# Altium PCB SensorBoard_PCB.PcbDoc (part 1 of 2)
Units mm, origin at the board's own origin, x right, y up, seen from the top; angles counter-clockwise.
Board outline 30.45 x 31.34 mm, 4 copper layers (Top Layer, GND, 3.3V, Bottom Layer), stack 1.561 mm thick; 41 components, 34 nets, 218 pads, 43 vias.
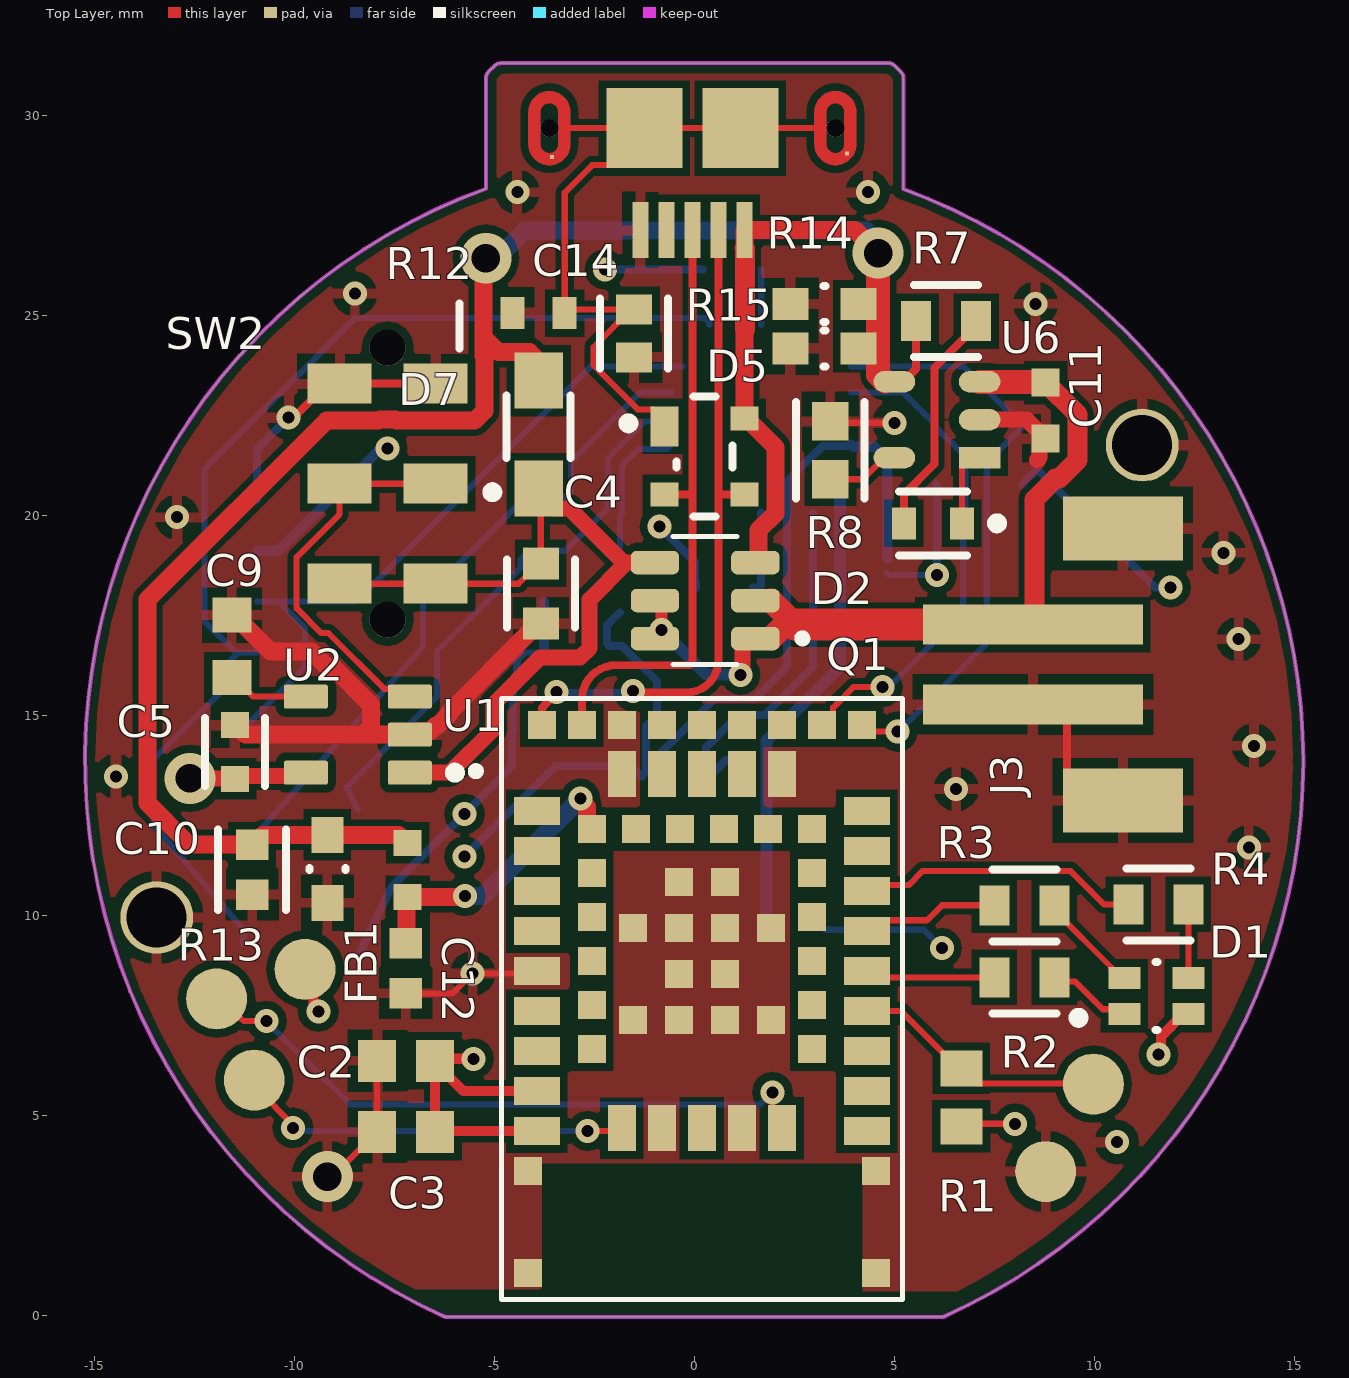
[diagram p0: Top Layer view]
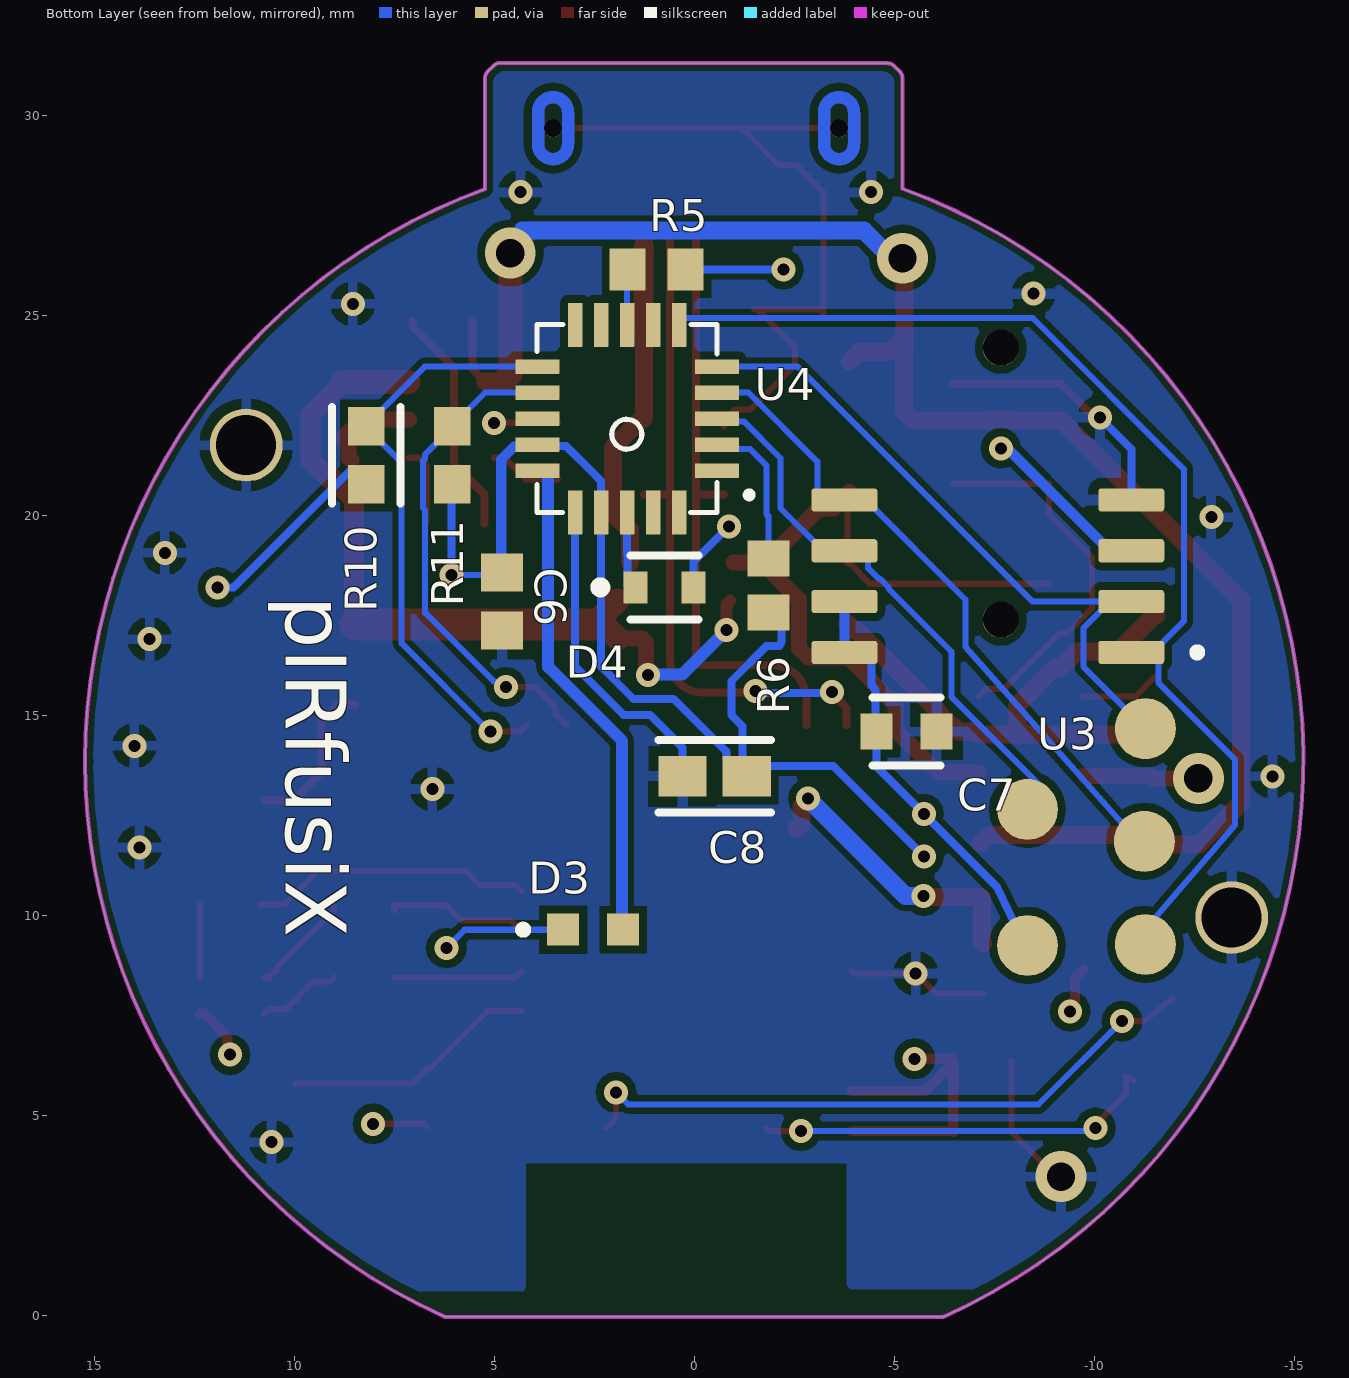
[diagram p1: Bottom Layer view, seen from below]
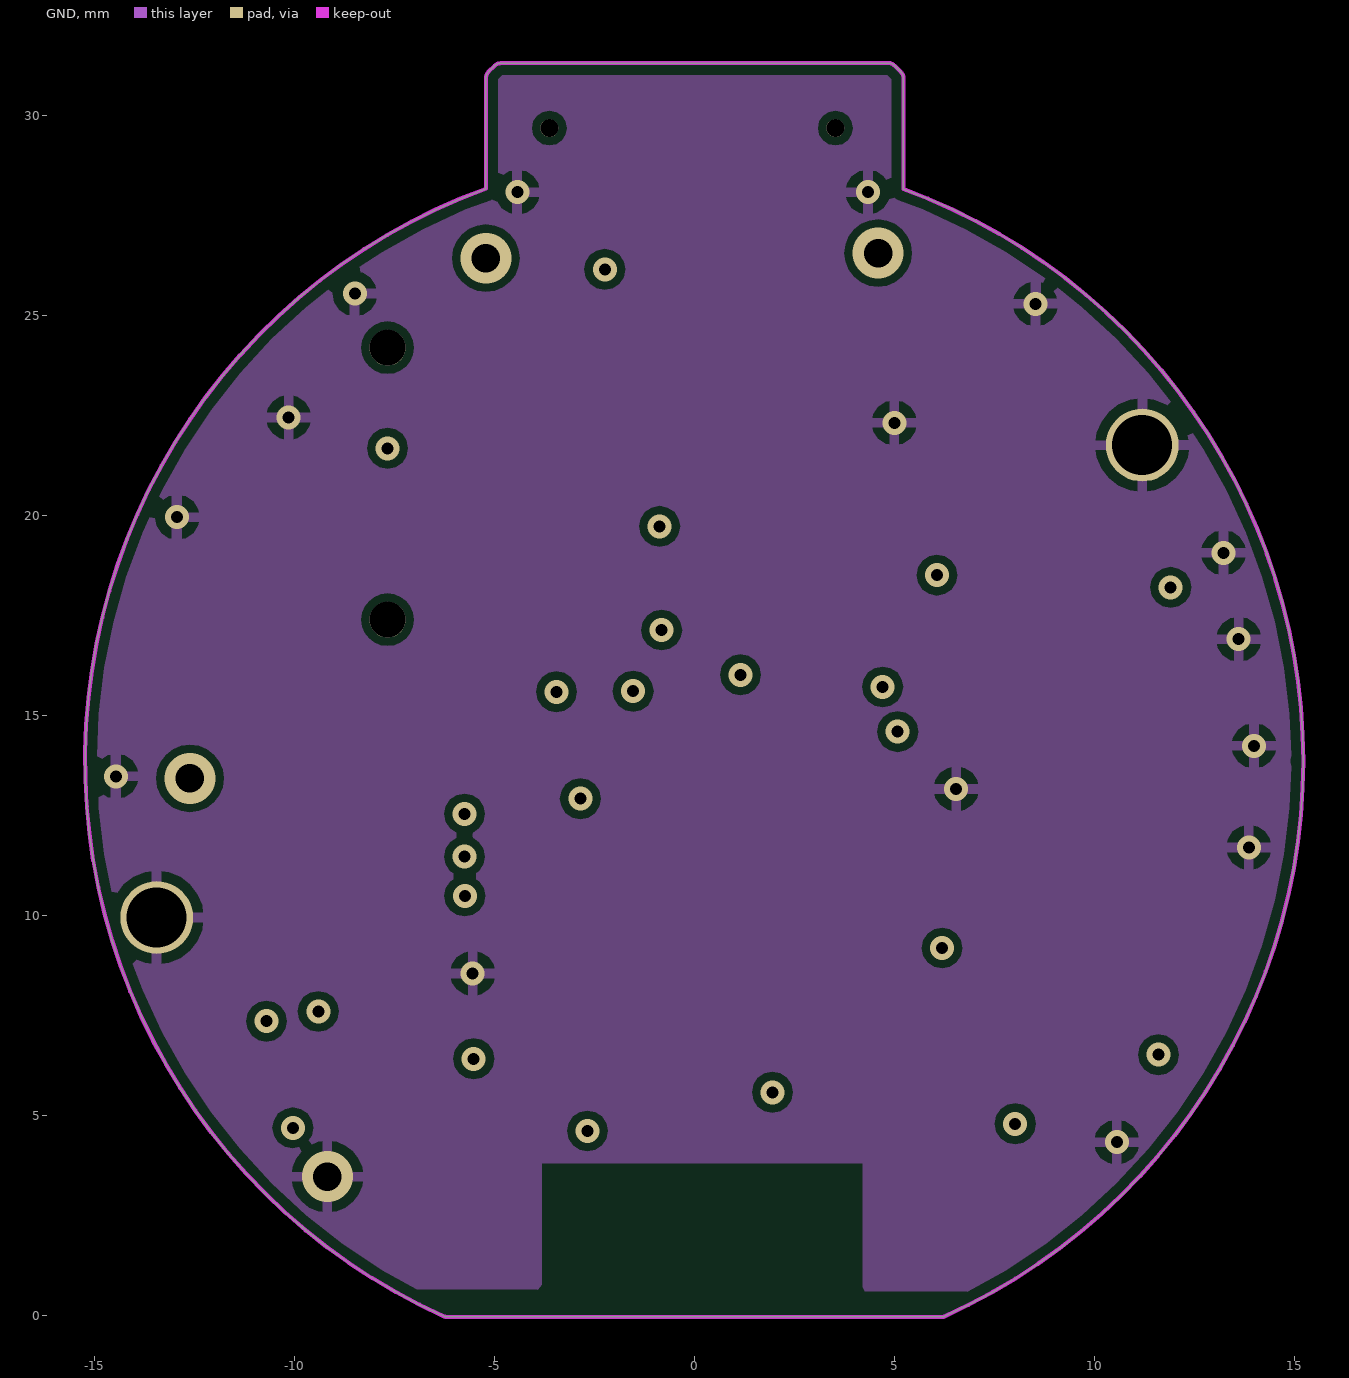
[diagram p2: GND]
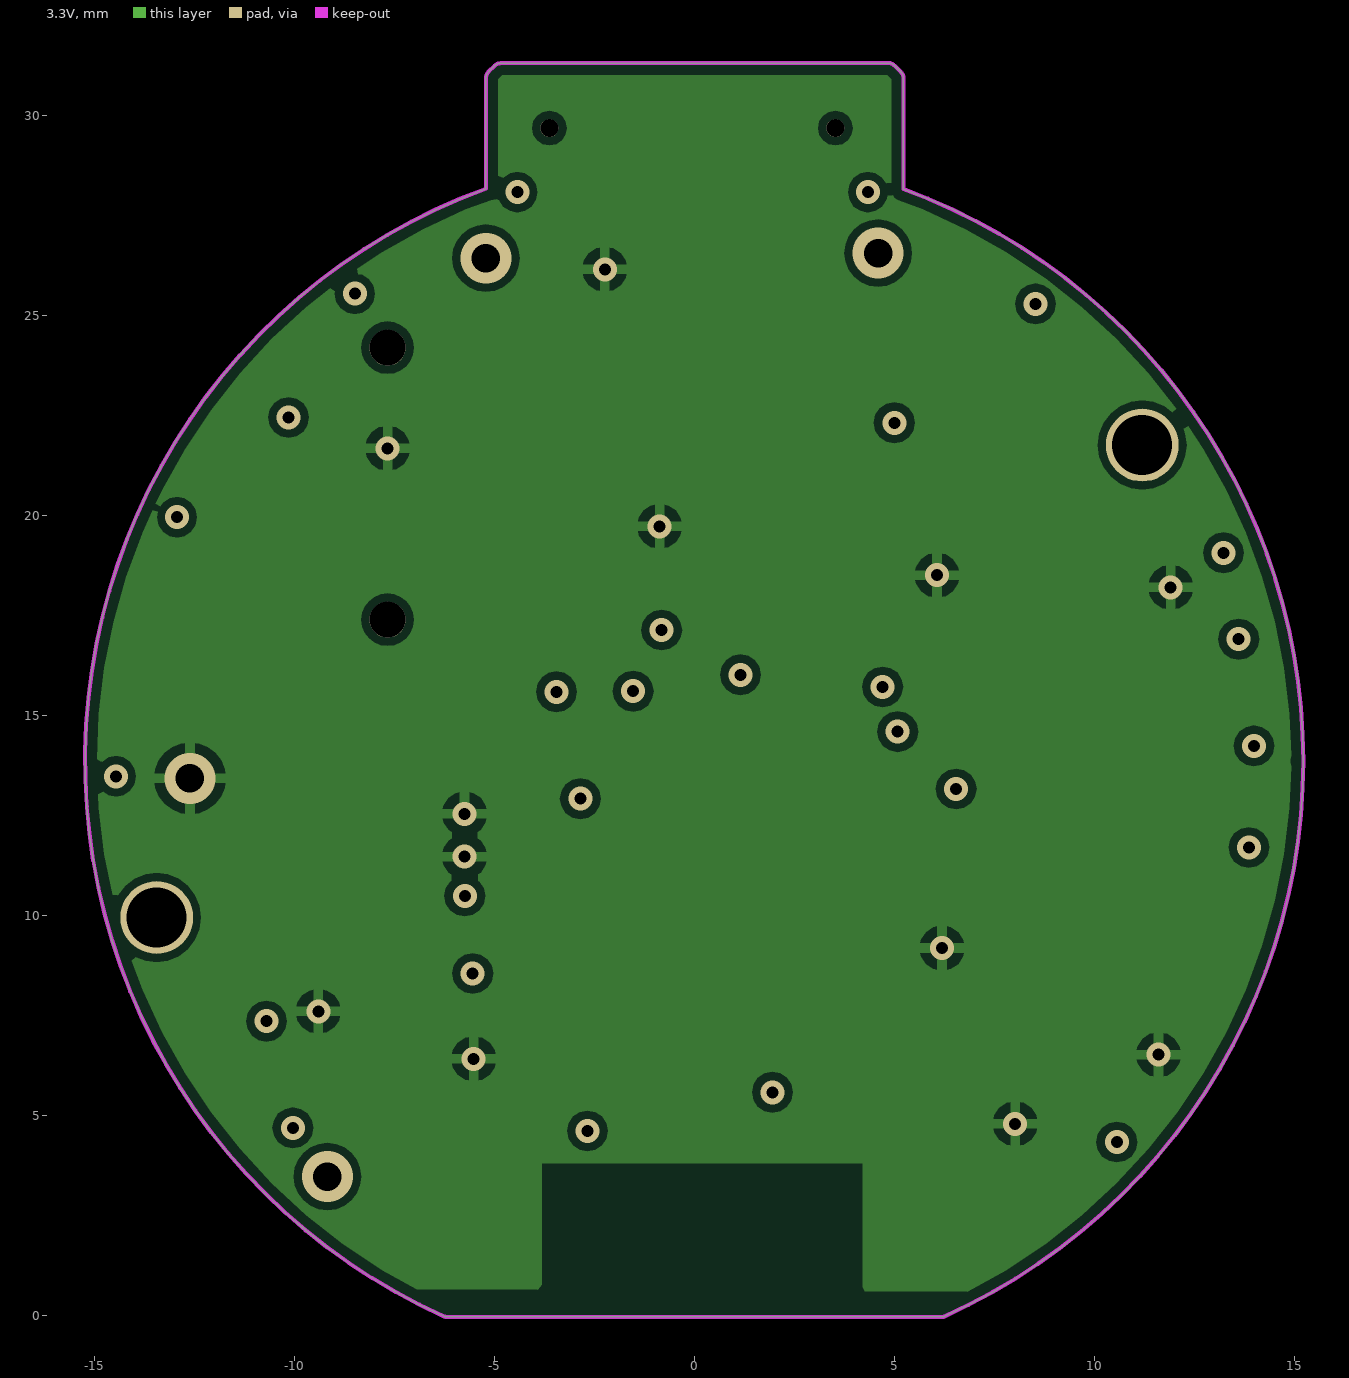
[diagram p3: 3.3V]
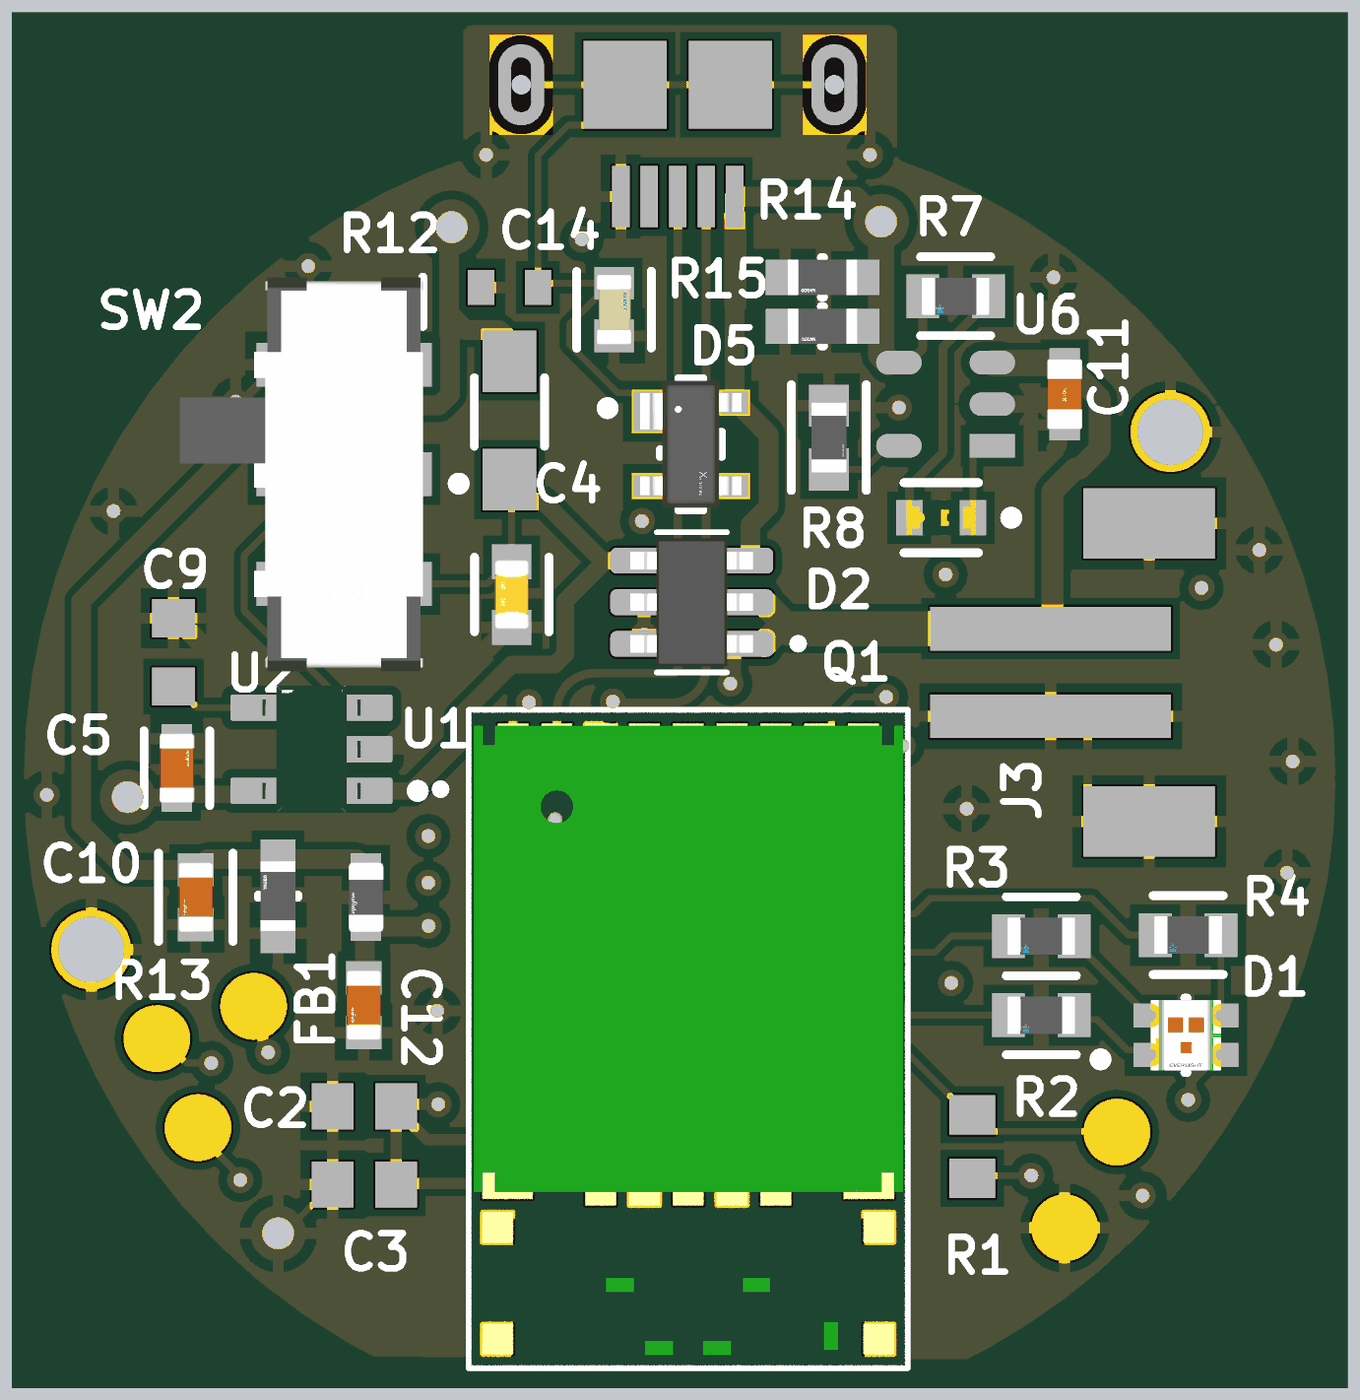
[diagram p5: 3D render of the assembled board from above, using the file's embedded part models]
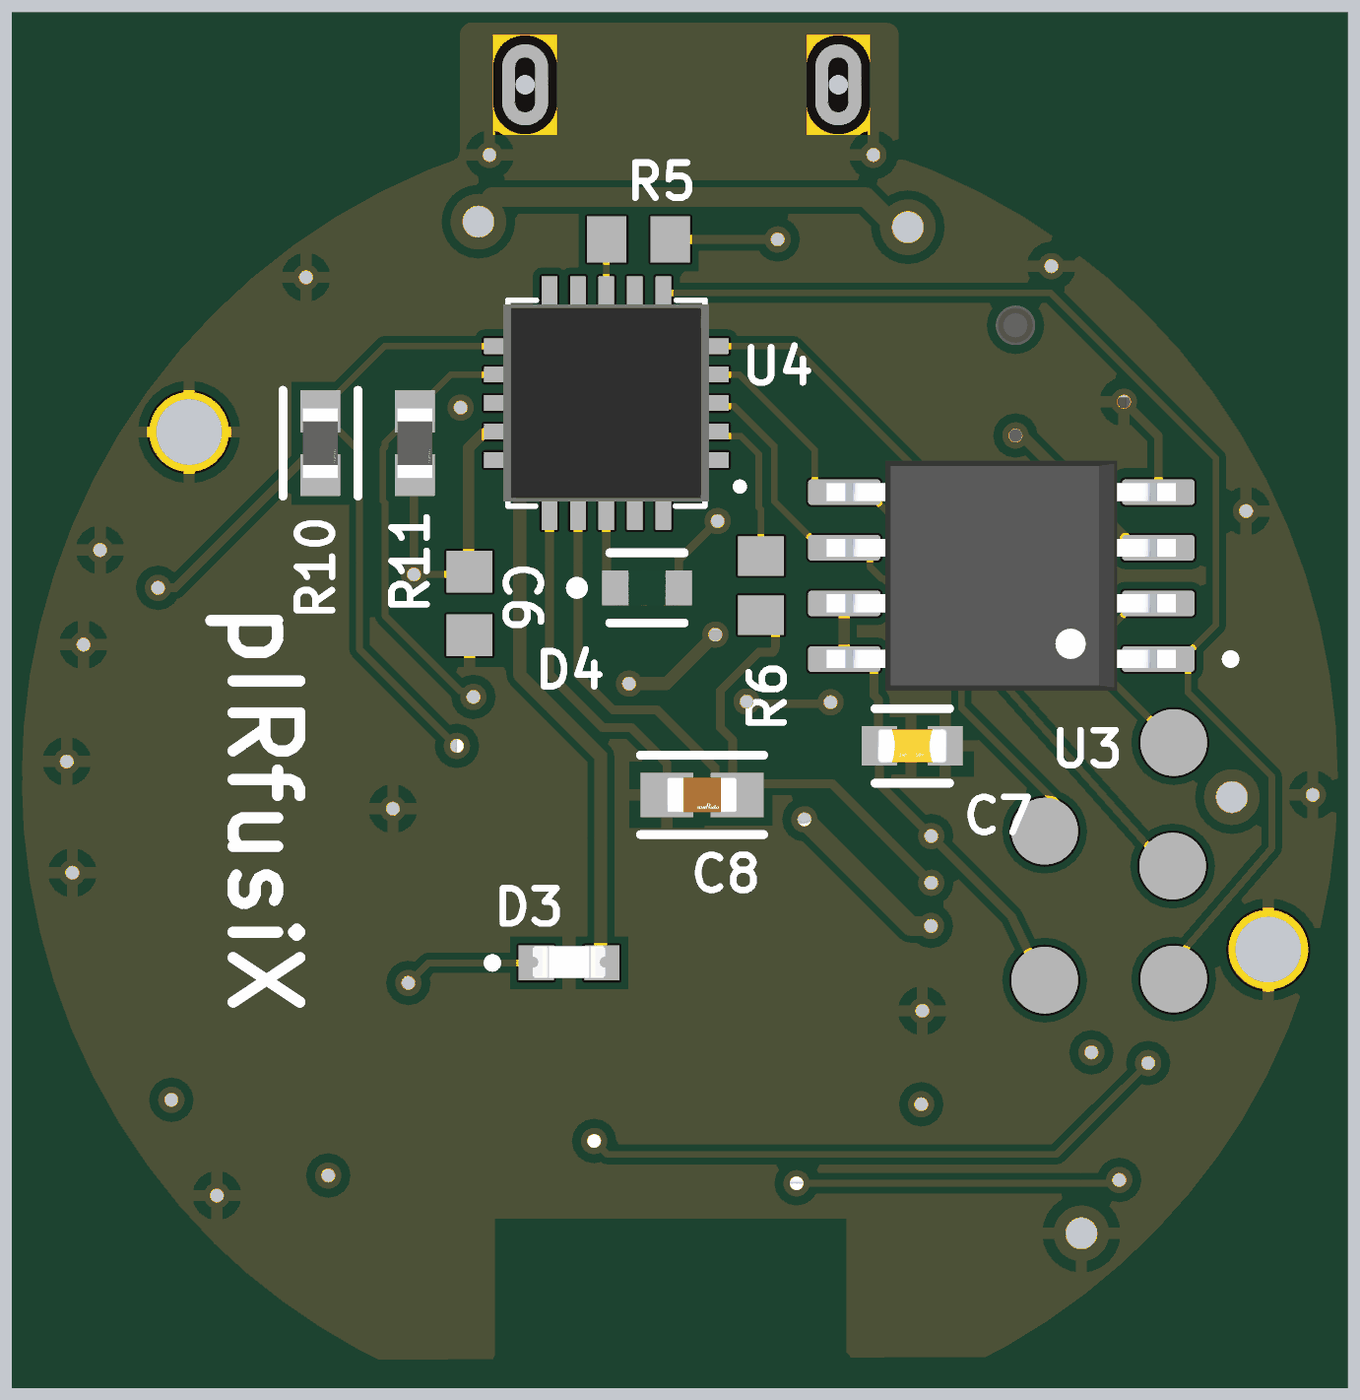
[diagram p6: 3D render of the assembled board from below, using the file's embedded part models]

## Layer stack, top to bottom
Top Solder: solder mask 0.0102, Solder Resist, Dk 3.5
Top Layer: signal copper 0.0356
Dielectric 2: prepreg 0.11, PP-006, Dk 4.1
GND: signal copper 0.035
Dielectric 1: dielectric 1.2, FR-4, Dk 4.8
3.3V: signal copper 0.035
Dielectric 3: prepreg 0.11, PP-006, Dk 4.1
Bottom Layer: signal copper 0.0356
Bottom Solder: solder mask 0.0102, Solder Resist, Dk 3.5

## Board outline
-6.255,-0.028 ccw(c-6.214,0.064) -6.214,-0.037 ccw(c-6.214,0.064) -6.213,-0.037 ccw(c-6.214,0.064) -6.213,-0.037 6.214,-0.037 ccw(c6.214,0.013) 6.214,-0.037 ccw(c6.214,0.063) 6.255,-0.028 ccw(c0,13.856) 15.228,13.856 ccw(c15.127,13.856) 15.228,13.856 ccw(c15.127,13.856) 15.228,13.856 ccw(c0,13.856) 5.232,28.157 5.232,30.928 ccw(c5.181,30.928) 5.232,30.929 cw(c5.005,30.929) 5.232,30.929 cw(c5.005,30.929) 5.232,30.928 ccw(c5.181,30.929) 5.232,30.928 ccw(c5.181,30.929) 5.232,30.929 5.232,30.928 ccw(c5.131,30.928) 5.232,30.93 ccw(c5.131,30.928) 5.232,30.93 ccw(c5.005,30.929) 5.164,31.09 ccw(c5.005,30.929) 5.164,31.09 ccw(c5.005,30.929) 5.164,31.09 ccw(c5.005,30.929) 5.164,31.09 ccw(c5.005,30.929) 5.164,31.09 ccw(c5.005,30.929) 5.164,31.09 ccw(c5.005,30.929) 5.163,31.091 5.164,31.09 cw(c5.128,31.054) 5.164,31.09 ccw(c5.129,31.054) 5.164,31.09 ccw(c5.093,31.019) 5.164,31.09 5.017,31.238 ccw(c4.981,31.202) 5.016,31.238 ccw(c4.981,31.202) 5.016,31.238 cw(c4.98,31.203) 5.016,31.238 cw(c4.98,31.203) 5.017,31.238 cw(c4.855,31.076) 5.017,31.237 cw(c4.855,31.076) 5.017,31.237 cw(c4.981,31.202) 5.017,31.237 ccw(c4.981,31.202) 5.017,31.238 ccw(c4.855,31.076) 5.016,31.238 ccw(c4.855,31.076) 5.016,31.239 cw(c4.98,31.203) 5.016,31.238 5.016,31.239 ccw(c4.855,31.076) 5.015,31.239 ccw(c4.855,31.076) 4.856,31.305 ccw(c4.855,31.076) 4.856,31.305 ccw(c4.856,31.254) 4.856,31.305 cw(c4.855,31.254) 4.857,31.305 ccw(c4.855,31.254) 4.856,31.305 cw(c4.856,31.254) 4.856,31.305 ccw(c4.855,31.076) 4.855,31.305 ccw(c4.855,31.254) 4.855,31.305 -4.83,31.305 ccw(c-4.83,31.254) -4.832,31.305 ccw(c-4.832,31.254) -4.833,31.305 ccw(c-4.83,31.077) -4.834,31.305 cw(c-4.83,31.204) -4.83,31.305 -4.834,31.305 ccw(c-4.83,31.077) -4.991,31.238 ccw(c-4.83,31.077) -4.991,31.237 ccw(c-4.83,31.077) -4.991,31.237 ccw(c-4.92,31.167) -4.992,31.237 cw(c-4.956,31.202) -4.991,31.237 cw(c-4.956,31.202) -4.991,31.238 ccw(c-4.956,31.202) -4.991,31.237 -4.992,31.237 ccw(c-4.92,31.167) -4.992,31.237 -4.991,31.238 -5.139,31.09 cw(c-5.103,31.054) -5.139,31.09 ccw(c-4.978,30.928) -5.139,31.09 cw(c-5.103,31.054) -5.139,31.09 ccw(c-4.978,30.928) -5.139,31.09 ccw(c-4.978,30.928) -5.14,31.089 ccw(c-4.978,30.928) -5.14,31.089 cw(c-5.104,31.053) -5.14,31.089 cw(c-5.104,31.053) -5.139,31.089 cw(c-5.104,31.053) -5.139,31.09 ccw(c-5.103,31.054) -5.14,31.089 ccw(c-5.103,31.054) -5.14,31.089 ccw(c-4.978,30.928) -5.14,31.088 cw(c-5.068,31.019) -5.139,31.09 -5.14,31.088 ccw(c-5.068,31.019) -5.141,31.088 -5.14,31.088 ccw(c-4.978,30.928) -5.206,30.928 -5.206,28.166 ccw(c0,13.856)

## Design rules (kind name [scope] priority, off if disabled: settings)
Clearance [All] p1: gap=0.2 ignorepadtopadclearanceinfootprint=FALSE except(0.152: Arc-Fill Arc-Poly Arc-Region Track-Fill Track-Poly Track-Region)
DiffPairsRouting [All] p1: maxlimit=0.45 minlimit=0.127 mostfreqgap=0.45 toplayer_mingap=0.45 toplayer_minwidth=0.198 toplayer_maxwidth=0.22 toplayer_prefwidth=0.218 midlayer1_maxgap=0.127 midlayer1_prefgap=0.127 midlayer1_minwidth=0.074 midlayer1_maxwidth=0.22 midlayer1_prefwidth=0.08 midlayer2_maxgap=0.127 midlayer2_prefgap=0.127 midlayer2_minwidth=0.074 midlayer2_maxwidth=0.22 midlayer2_prefwidth=0.08 bottomlayer_mingap=0.45 bottomlayer_minwidth=0.198 bottomlayer_maxwidth=0.22 bottomlayer_prefwidth=0.218 impedanceprofiledriven=TRUE impedanceprofileid={A604DC86-456C-41BB-91B7-0AEECFFA8053} impedanceprofilevalue=90.000000 maxuncoupledlength=12.7
HoleSize [All] p1: absolutevalues=TRUE maxlimit=2.54 minlimit=0.2 maxpercent=80.000 minpercent=20.000
MinimumAnnularRing [All] p1: minimumring=0.15
MinimumSolderMaskSliver NINA_SOLDERMASK [HasFootprint('XCVR_NINA-B306-00B-00')] p1: minsoldermaskwidth=0.2
MinimumSolderMaskSliver [All] p2: minsoldermaskwidth=0.2
PolygonConnect "Ground Plane RF" [HasFootprint('XCVR_NINA-B306-00B-00')] p1: connectstyle=Direct reliefconductorwidth=0.254 reliefentries=4 polygonreliefangle="90 Angle" airgapwidth=0.254
PolygonConnect PolygonConnect_1 [All] p2: connectstyle=Relief reliefconductorwidth=0.254 reliefentries=4 polygonreliefangle="90 Angle" airgapwidth=0.254
RoutingVias [All] p1: holewidth=0.3 width=1.27 viastyle="Through Hole" minholewidth=0.3 minwidth=0.6 maxholewidth=0.711 maxwidth=1.27
SilkToSolderMaskClearance [IsPad] p1: minsilkscreentomaskgap=0.051 clearancetoexposedcopper=TRUE
SolderMaskExpansion SolderMaskExpansionVIAS [IsVia] p1: expansion=0 istentingtop=TRUE
SolderMaskExpansion NINA_VIA [HasFootprint('XCVR_NINA-B306-00B-00')] p2: expansion=0.038 istentingtop=FALSE
SolderMaskExpansion SolderMaskExpansionAS7263 [HasFootprint('AS7263Footprint')] p3: expansion=0.038 istentingtop=FALSE
SolderMaskExpansion [All] p4: expansion=0.051 istentingtop=FALSE
Width [All] p1: maxlimit=0.81 minlimit=0.152 preferedwidth=0.152
26 further rules are at their usual default settings.

## Classes and differential pairs
differential pair USB: +USB_P -USB_N

## Components (designator, comment, footprint, x,y, rotation, side; value= is the part's Value field where it differs from the comment)
C2 "CL10B104KB8NNNC" SAMS-C0603-2_M -7.202,6.363 r0 top
C3 "CL10B104KB8NNNC" SAMS-C0603-2_M -7.202,4.585 r0 top
C4 "CC0603KRX7R7BB104" FP-CC0603-DA-MFG -3.835,18.047 r270 top value="100 nF"
C5 "GRM188R71A225KE15D" FP-GRM188-0_1-e0_2_0_5-MFG -11.481,14.084 r90 top
C6 "CL10B104KB8NNNC" SAMS-C0603-2_M 4.801,17.844 r270 bottom
C7 "CC0603KPX7R7BB105" FP-CC0603-DA-MFG -5.309,14.592 r180 bottom value="1 uF"
C8 "GRM188R60J106ME47D" FP-GRM188-0_1-e0_2_0_55-IPC_A -0.508,13.475 r180 bottom
C9 "C0603C103K3RACTU" RESC1608X55N -11.557,16.726 r270 top
C10 "GRM1885C1H102JA01D" FP-GRM188-0_1-e0_2_0_5-IPC_C -11.049,11.138 r270 top
C11 "C1608X5R0J106M080AB" FP-C1608-080-0_1-MFG 8.788,22.619 r90 top
C12 "GRM1885C1H102JA01D" FP-GRM188-0_1-e0_2_0_5-IPC_C -7.214,8.674 r270 top
C14 "C0603C472J5GACTU" FP-C0603C-CF-MFG -1.499,24.549 r270 top value="4,700 pF"
D1 "EAST1616RGBB2" FP-EAST1616RGBB2-MFG 11.557,7.988 r0 top
D2 "TLMO1000-GS08" FP-6_541-5056_01-4-MFG 5.969,19.799 r180 top
D3 "SIR19-21C/TR8" SIR19-21C/TR8 2.528,9.639 r180 bottom
D4 "TLMO1000-GS08" FP-6_541-5056_01-4-MFG 0.748,18.199 r180 bottom
D5 "PRTR5V0U2X,215" FP-SOT143B-MFG 0.254,21.476 r0 top
D7 "MBR0540T1G" ONSC-SOD-123-2-425-04_V -3.886,22.212 r90 top
FB1 "BLM18EG101TN1D" FP-BLM18-0_15-t0_5-MFG -7.163,11.138 r270 top
J3 "B2B-PH-SM4-TB(LF)(SN)" JST-B2B-PH-SM4-TB-2_V 10.719,16.269 r90 top
Q1 "TSM3443CX6RFG" SOT95P280X145-6N 0.275,17.869 r180 top
R1 "ERJ-3EKF3242V" RESC1608X55X30ML15T15 6.68,5.448 r270 top
R2 "CRCW0603330RFKEA" FP-CRCW0603-e3-MFG 8.255,8.446 r180 top
R3 "CRCW0603330RFKEA" FP-CRCW0603-e3-MFG 8.255,10.249 r180 top
R4 "CRCW0603330RFKEA" FP-CRCW0603-e3-MFG 11.608,10.274 r180 top
R5 "ERJ-3EKF3242V" RESC1608X55X30ML15T15 0.94,26.149 r180 bottom
R6 "CRCW060310K0FKTB" RESC1609X50X30ML10T20 -1.854,18.25 r90 bottom
R7 "CRCW06031K00FKEA" FP-CRCW0603-e3-MFG 6.299,24.854 r180 top
R8 "CR0603-FX-4701ELF" FP-CR0603-IPC_B 3.404,21.628 r270 top
R10 "CR0603-FX-4701ELF" FP-CR0603-IPC_B 8.204,21.501 r270 bottom
R11 "CR0603-FX-4701ELF" FP-CR0603-IPC_B 6.045,21.501 r270 bottom
R12 "RC0603FR-071ML" RESC1608X55X25LL10T15 -3.886,25.057 r0 top
R13 "RC0603FR-07100KL" FP-RC0603-0_55-MFG -9.169,11.163 r90 top
R14 "RC0603FR-07100KL" FP-RC0603-0_55-MFG 3.259,25.286 r180 top (schematic designator R13)
R15 "RC0603FR-07100KL" FP-RC0603-0_55-MFG 3.259,24.17 r180 top (schematic designator R13)
SW2 "JS102011JAQN" FP-JS102011JAQN-MFG -7.665,20.79 r270 top
U1 "NINA-B306-00B-00" XCVR_NINA-B306-00B-00 0.194,7.904 r0 top
U2 "TPS73033DBVR" FP-DBV0005A-MFG -8.407,14.516 r180 top
U3 "AT25SF041B-SHB-T" SOIC127P790X216-8N -7.341,18.479 r0 bottom
U4 "AS7263-BLGT" AS7263FOOTPRINT 1.676,22.416 r0 bottom
U6 "MCP73831T-2ATI/OT" FP-C04-091-OT-IPC_C 6.071,22.39 r180 top

## Footprints (in the part's own frame and the unit in brackets; to place one, negate y for a bottom-side part, rotate by r counter-clockwise, add the part's x,y. Pads: shape width x height; smd on the part's side, far side on the other; paste and mask are expansions set on the pad)
AS7263FOOTPRINT [mm]
  rrect9% 1.1x0.36 smd: 1(-2.245,1.3) 2(-2.245,0.65) 3(-2.245,0) 4(-2.245,-0.65) 5(-2.245,-1.3) 11(2.245,-1.3) 12(2.245,-0.65) 13(2.245,0) 14(2.245,0.65) 15(2.245,1.3)
  rrect9% 0.36x1.1 smd: 6(-1.3,-2.345) 7(-0.65,-2.345) 8(0,-2.345) 9(0.65,-2.345) 10(1.3,-2.345) 16(1.3,2.345) 17(0.65,2.345) 18(0,2.345) 19(-0.65,2.345) 20(-1.3,2.345)
  silkscreen extent -3.12,-2.35 2.25,2.35, body extent -2.35,-2.25 2.35,2.25, height 2.6
FP-6_541-5056_01-4-MFG [mm]
  rect 0.6x0.8 smd paste+0 mask+0: 1(-0.725,0) 2(0.725,0)
  silkscreen extent -1.73,-0.8 0.85,0.8, body extent -1.12,-0.55 1.12,0.55, height 0.25
FP-BLM18-0_15-t0_5-MFG [mm]
  rect 0.65x0.7 smd paste+0 mask+0: 1(-0.675,0) 2(0.675,0)
  body extent -1.1,-0.58 1.1,0.58, height 0.25
FP-C04-091-OT-IPC_C [mm]
  rect 1.038x0.538 smd paste+0 mask+0: 1(-1.066,0.95)
  rrect100% 1.038x0.538 smd paste+0 mask+0: 2(-1.066,0) 3(-1.066,-0.95) 4(1.066,-0.95) 5(1.066,0.95)
FP-C0603C-CF-MFG [mm]
  rect 0.75x0.9 smd paste+0 mask+0: 1(-0.6,0) 2(0.6,0)
  silkscreen extent -0.87,-0.85 0.88,0.85, body extent -1.2,-0.6 1.2,0.6, height 0.25
FP-C1608-080-0_1-MFG [mm]
  rect 0.7x0.7 smd paste+0 mask+0: 1(-0.7,0) 2(0.7,0)
  body extent -1.15,-0.55 1.15,0.55, height 0.25
FP-CC0603-DA-MFG [mm]
  rect 0.8x0.9 smd paste+0 mask+0: 1(-0.75,0) 2(0.75,0)
  silkscreen extent -0.85,-0.85 0.85,0.85, body extent -1.35,-0.75 1.35,0.75, height 0.25
FP-CR0603-IPC_B [mm]
  rect 0.958x0.912 smd paste+0 mask+0: 1(-0.727,0) 2(0.727,0)
  silkscreen extent -1.21,-0.86 1.21,0.86, body extent -1.46,-0.71 1.46,0.71, height 0.25
FP-CRCW0603-e3-MFG [mm]
  rect 0.75x1 smd paste+0 mask+0: 1(-0.75,0) 2(0.75,0)
  silkscreen extent -0.8,-0.9 0.8,0.9, body extent -0.77,-0.42 0.77,0.43, height 0.5
FP-DBV0005A-MFG [mm]
  rrect17% 1.1x0.6 smd paste+0 mask+0: 1(-1.3,0.95) 2(-1.3,0) 3(-1.3,-0.95) 4(1.3,-0.95) 5(1.3,0.95)
  silkscreen extent -2.55,0.83 -2.3,1.07, body extent -1.95,-1.78 1.95,1.78, height 0.25
FP-EAST1616RGBB2-MFG [mm]
  rect 0.8x0.55 smd paste+0 mask+0: 1(-0.8,-0.45) 2(-0.8,0.45) 3(0.8,0.45) 4(0.8,-0.45)
  silkscreen extent -2.07,-0.85 0.03,0.85, body extent -1.3,-0.95 1.3,0.95, height 0.25
FP-GRM188-0_1-e0_2_0_5-IPC_C [mm]
  rect 0.759x0.812 smd paste+0 mask+0: 1(-0.627,0) 2(0.627,0)
  silkscreen extent -1.01,-0.85 1.01,0.85, body extent -1.11,-0.55 1.11,0.55, height 0.25
FP-GRM188-0_1-e0_2_0_5-MFG [mm]
  rect 0.65x0.7 smd paste+0 mask+0: 1(-0.675,0) 2(0.675,0)
  silkscreen extent -0.85,-0.75 0.85,0.75, body extent -1.1,-0.55 1.1,0.55, height 0.25
FP-GRM188-0_1-e0_2_0_55-IPC_A [mm]
  rect 1.208x1.012 smd paste+0 mask+0: 1(-0.802,0) 2(0.802,0)
  silkscreen extent -1.41,-0.91 1.41,0.91, body extent -0.8,-0.4 0.8,0.4, height 0.9
FP-JS102011JAQN-MFG [mm]
  rect 1x1.6 smd paste+0 mask+0: 1(-2.5,1.2) 1(-2.5,-1.2) 2(0,1.2) 2(0,-1.2) 3(2.5,1.2) 3(2.5,-1.2)
  round 0.9 hole 0.9 unplated paste-1000 mask+0: ""(-3.4,0) ""(3.4,0)
  silkscreen extent -4.5,1.8 -3.37,1.8, body extent -4.6,-3.9 4.6,2.1, height 0.25
FP-RC0603-0_55-MFG [mm]
  rect 0.9x0.8 smd paste+0 mask+0: 1(-0.85,0) 2(0.85,0)
  silkscreen extent -0.03,-0.45 0.03,0.45, body extent -1.4,-0.55 1.4,0.55, height 0.25
FP-SOT143B-MFG [mm]
  rect 0.7x1 smd paste-1000 mask+0: 1(-1,0.75)
  rect 0.7x0.6 smd paste-1000 mask+0: 2(-1,-0.95) 3(1,-0.95) 4(1,0.95)
  silkscreen extent -2.02,-1.5 0.7,1.5, body extent -1.5,-1.63 1.5,1.63, height 0.25
JST-B2B-PH-SM4-TB-2_V [mm] "SMD, 2-Leads, Body 7.95x5mm, Pitch 2mm"
  rect 1x5.5 smd: 1(1,2.25) 2(-1,2.25)
  rect 1.6x3 smd: MP1(3.4,0) MP2(-3.4,0)
  body extent -3.97,-2.5 3.97,4.5, height 6.6
ONSC-SOD-123-2-425-04_V [mm] "SOD, 2-Leads, Body 2.69x1.6mm"
  rect 1.4x1.22 smd: 1(-1.543,0) 2(1.157,0)
  silkscreen extent -1.76,-0.8 0.78,1.28, body extent -1.35,-0.8 1.35,0.8, height 1.35
RESC1608X55N [mm]
  rect 0.87x0.98 smd: 1(-0.78,0) 2(0.78,0)
RESC1608X55X25LL10T15 [mm] "Chip Resistor, 2-Leads, Body 1.70x0.90mm, IPC High Density"
  rect 0.6x0.8 smd: 1(-0.65,0) 2(0.65,0)
  body extent -0.85,-0.45 0.85,0.45, height 0.55
RESC1608X55X30ML15T15 [mm] "Chip Resistor, 2-Leads, Body 1.60x0.80mm, IPC Low Density"
  rect 0.9x1.05 smd: 1(-0.725,0) 2(0.725,0)
  body extent -0.87,-0.48 0.87,0.48, height 0.55
RESC1609X50X30ML10T20 [mm] "Chip Resistor, 2-Leads, Body 1.55x0.85mm, IPC Low Density"
  rect 0.9x1.05 smd: 1(-0.675,0) 2(0.675,0)
  body extent -0.82,-0.48 0.82,0.48, height 0.5
SAMS-C0603-2_M [mm] "Chip Capacitor, 2-Leads, Body 1.70x0.90mm, IPC Low Density"
  rect 0.95x1.05 smd: 1(-0.725,0) 2(0.725,0)
  body extent -0.85,-0.45 0.85,0.45, height 0.9
SIR19-21C/TR8 [mm]
  rect 0.8x0.8 smd: 1(-0.75,0) 2(0.75,0)
  silkscreen extent -1.85,-0.1 -1.65,0.1, body extent -0.82,-0.34 0.83,0.38, height 0.68
SOIC127P790X216-8N [mm]
  rrect25% 1.65x0.58 smd: 1(-3.585,1.905) 2(-3.585,0.635) 3(-3.585,-0.635) 4(-3.585,-1.905) 5(3.585,-1.905) 6(3.585,-0.635) 7(3.585,0.635) 8(3.585,1.905)
  silkscreen extent -5.33,1.81 -5.14,2, body extent -3.99,-2.62 3.99,2.62, height 2.16
SOT95P280X145-6N [mm]
  rrect50% 1.21x0.59 smd: 1(-1.255,0.95) 2(-1.255,0) 3(-1.255,-0.95) 4(1.255,-0.95) 5(1.255,0) 6(1.255,0.95)
  silkscreen extent -2.53,-1.6 0.8,1.6, body extent -1.4,-1.46 1.4,1.46, height 1.5
XCVR_NINA-B306-00B-00 [mm]
  rect 1.15x0.7 smd: 2(-4.125,4.7) 3(-4.125,3.7) 4(-4.125,2.7) 5(-4.125,1.7) 6(-4.125,0.7) 7(-4.125,-0.3) 8(-4.125,-1.3) 9(-4.125,-2.3) 10(-4.125,-3.3) 16(4.125,-3.3) 17(4.125,-2.3) 18(4.125,-1.3) 19(4.125,-0.3) 20(4.125,0.7) 21(4.125,1.7) 22(4.125,2.7) 23(4.125,3.7) 24(4.125,4.7)
  rect 0.7x1.15 smd: 11(-2,-3.225) 12(-1,-3.225) 13(0,-3.225) 14(1,-3.225) 15(2,-3.225) 26(2,5.625) 27(1,5.625) 28(0,5.625) 29(-1,5.625) 30(-2,5.625)
  rect 0.7x0.7 smd: 31(-2.75,4.25) 32(-2.75,3.15) 33(-2.75,2.05) 34(-2.75,0.95) 35(-2.75,-0.15) 36(-2.75,-1.25) 37(2.75,-1.25) 38(2.75,-0.15) 39(2.75,0.95) 40(2.75,2.05) 41(2.75,3.15) 42(2.75,4.25) 43(1.65,4.25) 44(0.55,4.25) 45(-0.55,4.25) 46(-1.65,4.25) 47(4,6.85) 48(3,6.85) 49(2,6.85) 50(1,6.85) 51(0,6.85) 52(-1,6.85) 53(-2,6.85) 54(-3,6.85) 55(-4,6.85) EAGP1(-4.35,-4.3) EAGP2(4.35,-4.3) EAGP3(-4.35,-6.85) EAGP4(4.35,-6.85) EGP1(-0.575,2.925) EGP2(0.575,2.925) EGP3(-1.725,1.775) EGP4(-0.575,1.775) EGP5(0.575,1.775) EGP6(1.725,1.775) EGP7(-0.575,0.625) EGP8(0.575,0.625) EGP9(-1.725,-0.525) EGP10(-0.575,-0.525) EGP11(0.575,-0.525) EGP12(1.725,-0.525)
  silkscreen extent -5.75,-7.51 5.01,7.51, body extent -5,-7.5 5,7.5, height 2.63

## Part data
C2 C3 C6: library part CMP-2000-05332-1, "Multi-layer Ceramic Capacitor, -55 to 125 degC, 2-Pin SMD (0603), RoHS, Tape and Reel", Capacitance=0.1µF, Case Size/Dimension=0603, Dielectric=X7R, Manufacturer="Samsung Electro-Mechanics", Rated Voltage=50V, Tolerance (%)=±10%, Datasheet URL=https://datasheet.ciiva.com/29198/456651-da-01-en-vs-kondensator-0605-29198839.pdf, Datasheet Version=Nov-10, Manufacturer URL=http://www.samsungsem.com/global/index.jsp
C4: library part CMP-2000-05002-2, "CAP CER 0.1UF 16V X7R 0603", Capacitance="100 nF", Manufacturer=YAGEO, Package=CC0603-DA, Temperature="-55°C to +125°C", Temperature Characteristic=X7R, Temperature Coefficient=15%, Temperature Range High=+125°C, Temperature Range Low=-55°C, Tolerance=0.1, Voltage="16 V", Automotive=No, Category=Cap, ComponentLink2Description=Datasheet, ComponentLink2URL=http://www.yageo.com/documents/recent/UPY-GPHC_X7R_6.3V-to-50V_18.pdf, Device Class L1="Passive Components", Device Class L2=Capacitors, Device Class L3="Ceramic Capacitors", Digikey Description="CAP CER 0.1UF 16V X7R 0603", Footprint Url=http://www.yageo.com/exep/pages/download/literatures/UPY-C_GEN_24.pdf, Height=0.9mm, Lead Free=Yes, Manufacturer Part Number=CC0603KRX7R7BB104, Material=Ceramic, Mouser Description="Multilayer Ceramic Capacitor, CC Series, 0.1 - F, - 10%, X7R, 16 V, 0603 [1608 Metric]", Octopart=https://octopart.com/cc0603krx7r7bb104-yageo-192941, RoHS=TRUE, Voltage Rating="16 V"
C5: library part CMP-2006-02836-2, "Chip Multilayer Ceramic Capacitors for General Purpose, 0603, 2.2uF, X7R, 15%, 10%, 10V", Capacitance=2.2uF, Case Code (Imperial)=0603, Case Code (Metric)=1608, Dielectric=X7R, Max Operating Temperature=125°C, Min Operating Temperature=-55°C, Package Quantity=1, Tolerance=10%, Voltage=10V, Case/Package=0603, Depth=0.8mm, Height=0.8mm, Lead Free="Lead Free", Length=1.6mm, Material=Ceramic, Mount="Surface Mount", Number of Pins=2, Packaging="Cut Tape", REACH SVHC="No SVHC", Termination=SMD/SMT, Thickness=0.035inch, Voltage Rating=10V, Voltage Rating (DC)=10V, Weight=7.1E-05oz, Width=0.031inch
C7: library part CMP-03422-001047-1, "CC0603 1 uF X7R 10.00% 16 V", Capacitance="1 uF", Manufacturer=YAGEO, Package=CC0603-DA, Temperature="-55°C to +125°C", Temperature Characteristic=X7R, Temperature Coefficient=15%, Temperature Range High=+125°C, Temperature Range Low=-55°C, Tolerance=0.1, Voltage="16 V", Automotive=No, Category=Cap, ComponentLink2Description=Datasheet, ComponentLink2URL=http://www.yageo.com/documents/recent/UPY-GPHC_X7R_6.3V-to-50V_18.pdf, Device Class L1="Passive Components", Device Class L2=Capacitors, Device Class L3="Ceramic Capacitors", Footprint Url=http://www.yageo.com/exep/pages/download/literatures/UPY-C_GEN_24.pdf, Height=0.9mm, Lead Free=Yes, Manufacturer Part Number=CC0603KPX7R7BB105, Material=Ceramic, Mouser Description="Cap Ceramic 1uF 16V X7R 10% SMD 0603 125°C Paper T/R", Octopart=https://octopart.com/cc0603kpx7r7bb105-yageo-25629533, RoHS=TRUE, Voltage Rating="16 V"
C8: library part CMP-2006-02792-2, "Chip Multilayer Ceramic Capacitors for General Purpose, 0603, 10uF, X5R, 15%, 20%, 6.3V", Capacitance=10uF, Case Code (Imperial)=0603, Case Code (Metric)=1608, Dielectric=X5R, Max Operating Temperature=85°C, Min Operating Temperature=-55°C, Package Quantity=4000, Tolerance=20%, Voltage=6.3V, Case/Package=0603, Depth=0.8mm, Height=0.8mm, Lead Free="Lead Free", Length=1.6mm, Material=Ceramic, Mount="Surface Mount", Packaging="Tape and Reel", Radiation Hardening=No, REACH SVHC="No SVHC", Termination=SMD/SMT, Thickness=0.035inch, Voltage Rating=6.3V, Voltage Rating (DC)=6.3V, Width=0.031inch
C9: Capacitance=0.01uF, Supplier Part Number 1=399-C0603C103K3RAC7867CT-ND, Supplier 1=Digi-Key
C10 C12: library part CMP-1662-00022-2, "Chip Multilayer Ceramic Capacitors for General Purpose, 0603, 1000pF, C0G, 30ppm/°C, 5%, 50V", Capacitance=1nF, Case Code (Imperial)=0603, Case Code (Metric)=1608, Dielectric=C0G, Dielectric Material=Ceramic, Insulation Resistance=10GR, Max Operating Temperature=125°C, Min Operating Temperature=-55°C, Package Quantity=1, Temperature Coefficient=30ppm/°C, Tolerance=5%, Voltage=50V, Case/Package=0603, Depth=0.8mm, Height=0.8mm, Lead Free="Lead Free", Length=1.6mm, Material=Ceramic, Mount="Surface Mount", Number of Pins=2, Packaging="Tape and Reel", Radiation Hardening=No, REACH SVHC="No SVHC", Termination=SMD/SMT, Thickness=0.035inch, Voltage Rating=50V, Voltage Rating (DC)=50V, Width=0.8mm
C11: library part CMP-2000-04978-2, "Multilayer Ceramic Capacitors 10μF ±20% 6.3V X5R SMD 0603", Capacitance=10uF, Case Code (Imperial)=0603, Case Code (Metric)=1608, Dielectric=X5R, Dielectric Material=Ceramic, Max Operating Temperature=85°C, Min Operating Temperature=-55°C, Package Quantity=1, Tolerance=20%, Voltage=6.3V, Case/Package=0603, Construction=Flat, Depth=0.8mm, Height=0.8mm, Lead Free="Lead Free", Length=1.6mm, Mount="Surface Mount", Packaging="Tape and Reel", Radiation Hardening=No, REACH SVHC="No SVHC", Resistor Type=Ceramic, RoHS Compliant=Yes, Series=C, Termination=SMD/SMT, Thickness=0.035inch, Voltage Rating=6.3V, Voltage Rating (DC)=6.3V, Weight=7.1E-05oz, Width=0.031inch
C14: library part CMP-2006-03333-2, "CAP CER 4700PF 50V 5% NP0 0603", Capacitance="4,700 pF", Manufacturer=KEMET, Package=C0603C-CF, Temperature="-55°C to +125°C", Temperature Characteristic=C0G, Temperature Coefficient=30ppm/°C, Temperature Range High=+125°C, Temperature Range Low=-55°C, Tolerance=0.05, Voltage Rating="50 V", Automotive=Yes, Automotive Grade="Grade 1", Category=Cap, ComponentLink2Description=Datasheet, ComponentLink2URL=https://api.kemet.com/component-edge/download/datasheet/C0603C100J5GACAUTO.pdf, Device Class L1="Passive Components", Device Class L2=Capacitors, Device Class L3="Ceramic Capacitors", Digikey Description="CAP CER 4700PF 50V 5% NP0 0603", Height=0.87mm, Lead Free=Yes, Manufacturer Part Number=C0603C472J5GACTU, Material=Ceramic, Mouser Description="Multilayer Ceramic Capacitors MLCC - SMD/SMT 50volts 4700pF 5% C0G", Octopart=https://octopart.com/c0603c472j5gactu-kemet-9145067, RoHS=TRUE
D1: library part CMP-51564-000002-1, "LED RGB DIFFUSED 4SMD", Colour="Blue, Green, Red", Forward Current=5mA, Forward Voltage=3/3/2.1V, Manufacturer=Everlight, Package=0, Power Dissipation=95/95/60mW, Reverse Voltage=5V, Temperature="-40°C to +85°C", Temperature Range High=+85°C, Temperature Range Low=-40°C, Automotive=No, Category=Diode, ComponentLink2Description=Datasheet, ComponentLink2URL=https://everlightamericas.com/index.php?controller=attachment&id_attachment=2426, Device Class L1=Optoelectronics, Device Class L2=LEDs, Device Class L3=unset, Digikey Description="LED RGB DIFFUSED 4SMD", Height=0.45mm, Lead Free=Yes, Led Orientation="Top View", Luminous Intensity=36/140/45mcd, Manufacturer Part Number=EAST1616RGBB2, Octopart=https://octopart.com/east1616rgbb2-everlight-80328051, Peak Emmision Wavelength=468/518/632nm, RoHS=TRUE, Viewing Angle=120°, Wavelength=475/535/628nm
D2 D4: library part CMP-02520-000010-1, "LED ORANGE 0603 SMD", Ambient Temperature Range High=+100°C, Ambient Temperature Range Low=-40°C, Colour=Orange, Forward Current=2mA, Forward Voltage=1.8V, Manufacturer=Vishay, Max Junction Temp=+120°C, Package=6.541-5056.01-4, Power Dissipation=40mW, Reverse Voltage=6V, Temperature="-40°C to +100°C", Automotive=Yes, Automotive Grade="Grade 2", Category=Diode, ComponentLink2Description=Datasheet, ComponentLink2URL=http://www.vishay.com/docs/83172/tlmo1000.pdf, Device Class L1=Optoelectronics, Device Class L2=LEDs, Device Class L3=unset, Digikey Description="LED ORANGE 0603 SMD", Height=0.65mm, Lead Free=Yes, Led Orientation="Top View", Luminous Intensity=7.5mcd, Manufacturer Part Number=TLMO1000-GS08, Octopart=https://octopart.com/tlmo1000-gs08-vishay-41955669, Peak Emmision Wavelength=610nm, RoHS=TRUE, Temperature Range High=+100°C, Temperature Range Low=-40°C, Viewing Angle=160°, Wavelength=605nm
D3: Supplier Part Number 1=1080-1425-1-ND, Supplier 1=Digi-Key
D5: library part CMP-14436-000007-1, "TVS DIODE 5.5V SOT143B"
D7: library part CMP-1055-00401-1, "Schottky Power Rectifier, 2-Pin SOD-123, Pb-Free, Tape and Reel", Manufacturer="On Semiconductor", ComponentLink1Description="Manufacturer URL", ComponentLink1URL=http://www.onsemi.com/, ComponentLink2Description=Datasheet, ComponentLink2URL=http://www.onsemi.cn/pub_link/Collateral/MBR0540T1-D.PDF, ComponentLink3Description="Package Specification", ComponentLink3URL=http://www.onsemi.com/pub_link/Collateral/425-04.PDF, Configuration=Single, DatasheetVersion="Rev. 7", IFSM Max (A)=5.5, Mounting Technology="Surface Mount", PackageDescription="2-Pin SOD, Body 1.6 x 2.69 mm", PackageReference=SOD-123-2-425-04, PackageVersion="Rev. G, 10/2009", Packing="Tape and Reel", PartNumber=MBR0540T1G, RoHS=TRUE
FB1: library part CMP-0686-00530-3, "Chip Ferrite Bead, 0603, 100Ω @ 100MHz, 25%, 0.045Ω, 2A", Case Code (Imperial)=0603, Case Code (Metric)=1608, Current Rating=2A, DC Resistance (DCR)=45mR, Max Operating Temperature=125°C, Min Operating Temperature=-55°C, Package Quantity=1, Test Frequency=100MHz, Tolerance=25%, Case/Package=0603, Contact Plating=Tin, Core Material=Ferrite, Depth=0.8mm, Height=0.8mm, Impedance=100R, Lead Free="Lead Free", Length=1.6mm, Material=Ferrite, Max Current Rating=2A, Max DC Current=2A, Number of Circuits=1, Number of Lines=1, Number of Pins=2, Packaging="Tape and Reel", REACH SVHC="No SVHC", Termination=SMD/SMT, Width=0.8mm
J3: library part CMP-2000-05163-1, "Male Header, Pitch 2 mm, 1 x 2 Position, Height 6.6 mm, RoHS, Tape and Reel", Manufacturer=JST, Datasheet URL=https://ciiva.com/datasheet-click-26894756?src=ciiva&sig=90099765, Datasheet Version=Dec-12, Manufacturer URL=http://www.jst.com/home2.html, No of Positions=2, Pitch=2mm, Style/Orientation=StraightHeader/Plug, Termination=Crimp, Type=ShroudedHeader
Q1: Supplier Part Number 1=TSM3443CX6RFGCT-ND, Supplier 1=Digi-Key
R1: library part CMP-2000-00433-1, Manufacturer=Panasonic, Resistance=32.4kR, Part Number=ERJ-3EKF3242V
R2 R3 R4: library part CMP-1012-00454-3, "RES Thick Film, 330Ω, 1%, 0.1W, 100ppm/°C, 0603", Case Code (Imperial)=0603, Case Code (Metric)=1608, Max Operating Temperature=155°C, Max Power Dissipation=100mW, Min Operating Temperature=-55°C, Package Quantity=10, Resistance=330R, Temperature Coefficient=100ppm/°C, Tolerance=1%, Voltage Rating=75V, Case/Package=0603, Composition="Thick Film", Contact Plating=Tin, Depth=0.85mm, Features="Automotive AEC-Q200", Height=0.45mm, Lead Free="Lead Free", Length=1.55mm, Military Standard=Not, Mount="Surface Mount", Number of Terminations=2, Packaging="Tape and Reel", Power Rating=100mW, Radiation Hardening=No, Termination=SMD/SMT, Voltage Rating (DC)=75V, Weight=7.1E-05oz, Width=0.033inch
R5: library part CMP-2000-00433-1, Manufacturer=Panasonic, Part Number=ERJ-3EKF3242V
R6: library part CMP-2000-03837-1, Manufacturer="Vishay Dale", Part Number=CRCW060310K0FKTB
R7: library part CMP-1666-00003-5, "RES Thick Film, 1kΩ, 1%, 0.1W, 100ppm/°C, 0603", Case Code (Imperial)=0603, Case Code (Metric)=1608, Max Operating Temperature=155°C, Max Power Dissipation=100mW, Min Operating Temperature=-55°C, Package Quantity=10, Resistance=1kR, Temperature Coefficient=100ppm/°C, Tolerance=1%, Voltage Rating=75V, Case/Package=0603, Composition="Thick Film", Contact Plating=Tin, Depth=0.85mm, Features="Automotive AEC-Q200", Height=0.45mm, Lead Free="Lead Free", Length=1.55mm, Military Standard=Not, Mount="Surface Mount", Number of Pins=2, Number of Terminations=2, Packaging="Tape and Reel", Power Rating=100mW, Radiation Hardening=No, Termination=SMD/SMT, Voltage Rating (DC)=75V, Weight=7.1E-05oz, Width=0.033inch
R8 R10 R11: library part CMP-07231-003020-1, "Thick Film Chip Resistors 0603 4.7kΩ 0.1W 1% 100ppm/°C", Case Code (Imperial)=0603, Case Code (Metric)=1608, Max Operating Temperature=155°C, Max Power Dissipation=100mW, Min Operating Temperature=-55°C, Package Quantity=1, Resistance=4.7kR, Temperature Coefficient=100ppm/°C, Tolerance=1%, Voltage Rating=50V, Case/Package=0603, Composition="Thick Film", Contact Plating=Tin, Depth=0.8mm, Features="Moisture Resistant", Height=0.45mm, Length=1.6mm, Mount="Surface Mount", Number of Pins=2, Number of Terminations=2, Packaging="Tape and Reel", Power Rating=100mW, Radiation Hardening=No, REACH SVHC="No SVHC", Termination=SMD/SMT, Thickness=457um, Voltage Rating (DC)=50V, Width=0.8mm
R12: library part CMP-1659-00056-1, "Chip Resistor, 1 MOhm, +/- 1%, 100 mW, -55 to 155 degC, 0603 (1608 Metric), RoHS, Tape and Reel", Capacitance="1 mF", Case\Package=Radial, Max Operating Temperature="85 degC", Min Operating Temperature="-40 degC", Package Quantity=200, Resistance=1MR, Tolerance=20%, Voltage Rating="25 V", ComponentLink1Description="Manufacturer URL", ComponentLink1URL=http://www.yageo.com/, ComponentLink2Description=Datasheet, ComponentLink2URL=http://www.yageo.com/documents/recent/PYu-RC_Group_51_RoHS_L_04.pdf, DatasheetVersion="Rev. 4, 02/2016", Diameter="10 mm", Height="20 mm", Lead Pitch="5 mm", Length="20 mm", Mount="Through Hole", PackageDescription="2-Pin Surface Mount Device, Body 1.6 x 0.8 mm", PackageReference=0603, Packaging=Bulk, Radiation Hardening=No, REACH SVHC="No SVHC", RoHSCompliant=true, Voltage Rating (DC)="25 V", Width="0 inch"
R13 R14 R15: library part CMP-2100-03662-2, "RES SMD 100K OHM 1% 1/10W 0603", Case Code (Imperial)=0603, Case Code (Metric)=1608, Max Operating Temperature=155°C, Max Power Dissipation=100mW, Min Operating Temperature=-55°C, Resistance=100kR, Resistance Tolerance=1%, Resistor Type="Thick Film", Temperature Coefficient=100ppm/°C, Voltage Rating=50V, Working Voltage=75V, Case/Package=0603, Construction=Rectangular, Depth=0.8mm, Features="Moisture Resistant", Height=0.45mm, Lead Free="Lead Free", Length=1.6mm, Military Standard=Not, Number of Pins=2, Number of Terminations=2, Packaging="Tape and Reel", Power Rating=100mW, REACH SVHC="No SVHC", RoHS Compliant=Yes, Series=RC, Technology="THICK FILM", Termination=SMD/SMT, Tolerance=1%, Voltage Rating (DC)=50V, Width=0.8mm
SW2: library part CMP-10038-000001-1, "SWITCH SLIDE SPDT 300MA 6V", Contact Current Rating=300mA, Contact Resistance=70mΩ, Manufacturer=C&K, Temperature="-40°C to +85°C", Temperature Range High=+85°C, Temperature Range Low=-40°C, Voltage Rating Dc=6V, Automotive=No, Category=Switch, ComponentLink2Description=Datasheet, ComponentLink2URL=https://www.ckswitches.com/media/1422/js.pdf, Device Class L1=Electromechanical, Device Class L2=Switches, Device Class L3="Slide Switches", Digikey Description="SWITCH SLIDE SPDT 300MA 6V", Electromechanical Life=5000Cycles, Height=3.5mm, Lead Free=Yes, Manufacturer Part Number=JS102011JAQN, Mount="Surface Mount", Mouser Description="JS Series Sub-Miniature Slide Switch SPDT Right-Angle SMT", Octopart=https://octopart.com/js102011jaqn-c%26k+components-74831566, Package=JS102011JAQN, RoHS=TRUE, Throw Configuration=SPDT
U1: "With internal PCB antenna, 10.0 x 15.0 x 2.2 mm, use with open CPU", Package="SMD-55 u-blox", Availability=Unavailable, MF=u-blox, MP=NINA-B306-00B-00, Price=None, SnapEDA_Link=https://www.snapeda.com/parts/NINA-B306-00B-00/u-blox/view-part/4176731/?ref=snap
U2: library part CMP-04917-000026-1, "IC REG LINEAR 3.3V 200MA SOT23-5", Dropout Voltage=120mV, Manufacturer="Texas Instruments", Max Junction Temp=+125°C, Max Supply Voltage=5.5V, Min Supply Voltage=2.7V, Nominal Supply Current=170uA, Output Current=200mA, Output Voltage=3.3V, Package=DBV0005A, Temperature="-40°C to +125°C", Temperature Range Low=-40°C, Accuracy Percentage=2%, Automotive=No, Category=IC, ComponentLink2Description=Datasheet, ComponentLink2URL=http://www.ti.com/lit/ds/symlink/tps730.pdf, Device Class L1="Integrated Circuits (ICs)", Device Class L2="Power Management ICs", Device Class L3="Voltage Regulators - Linear", Digikey Description="IC REG LINEAR 3.3V 200MA SOT23-5", Height=1.45mm, Lead Free=Yes, Manufacturer Part Number=TPS73033DBVR, Mouser Description="IC REG LINEAR 3.3V 200MA SOT23-5", Number of Outputs=1, Octopart=https://octopart.com/tps73033dbvr-texas+instruments-525554, Output Type=Fixed, RoHS=TRUE, Standoff Height=0mm, Temperature Range High=+125°C
U3: "4 Mbit, 3.0V (2.7V to 3.6V), -40C to 85C, SOIC-W 208mil (Tape & Reel), Single, Dual, Quad SPI NOR flash", Package="SOIC-8 Dialog Semiconductor", Supplier Part Number 1=1265-AT25SF041B-SHB-TCT-ND, Availability=Warning, Check_prices=https://www.snapeda.com/parts/AT25SF041B-SHB-T/Dialog%20Semiconductor/view-part/5488498/?ref=eda, MF="Dialog Semiconductor", MP=AT25SF041B-SHB-T, Price=None, Purchase-URL=https://pricing.snapeda.com/search/part/AT25SF041B-SHB-T/?ref=eda, SnapEDA_Link=https://www.snapeda.com/parts/AT25SF041B-SHB-T/Dialog%20Semiconductor/view-part/5488498/?ref=snap, Supplier 1=Digi-Key
U4: "Optical Sensor Ambient 610nm, 680nm, 730nm, 760nm, 810nm, 860nm IÂ²C, SPI 20-BFLGA", Package="LGA-20 ams", Availability=Unavailable, MF=ams, MP=AS7263-BLGT, Price=None, SnapEDA_Link=https://www.snapeda.com/parts/AS7263-BLGT/ams/view-part/1600359/?ref=snap
U6: library part CMP-0133-00144-2, "IC CONTROLLR LI-ION 4.2V SOT23-5", Case/Package=SOT-23, Max Charge Current=500mA, Max Operating Temperature=85°C, Max Output Voltage=4.232V, Max Supply Voltage=6V, Min Operating Temperature=-40°C, Min Output Voltage=4.168V, Min Supply Voltage=3.75V, Output Voltage=4.2V, Package Quantity=3000, Height=1.3mm, Lead Free="Lead Free", Length=3.1mm, Max Output Current=500mA, Mount="Surface Mount", Number of Cells=1, Number of Pins=5, Output Current=500mA, Packaging="Tape and Reel", REACH SVHC="No SVHC", Width=1.8mm

## Free pads (board coordinates)
  round 1.524 smd far side: 1(-11.278,9.271) 1(-11.252,11.849) 1(-8.331,9.246) 1(-8.331,12.647) ""(-11.278,14.669)
  round 1.524 smd paste-3: 1(-9.728,8.649) 2(-11.938,7.912) 3(-10.998,5.88) 5(8.788,3.594) 6(9.982,5.779)
  rect 0.4x1.4 smd: 1(1.256,27.13) 2(0.606,27.13) 3(-0.044,27.13) 4(-0.694,27.13) 5(-1.344,27.13)
  rect 0.1x0.1 smd paste-1 mask+0: 6(3.826,29.05) 7(-3.554,28.96)
  rect 1.9x2 smd: 8(1.156,29.68) 9(-1.244,29.68)
  round 1.82 hole 1.5: 13(11.201,21.755) 14(-13.437,9.944)
  round 0.45 hole 0.45 unplated: ""(-3.619,29.68) ""(3.531,29.68)

## Via types
v1: diameter 0.6, hole 0.3, Top Layer to Bottom Layer, tented both sides, 36 vias
v2: diameter 1.27, hole 0.711, Top Layer to Bottom Layer, tented both sides, 4 vias
v3: diameter 0.6, hole 0.3, Top Layer to Bottom Layer, tented top, 3 vias

## Nets (pads, with @x,y where several pads share a name; then routed paths per layer and width w, separated by ;. In a path a pad name is that pad's centre, name@x,y a point inside that pad or via, vN(x,y) a via of type N, cw(c..) or ccw(c..) an arc to the next point about the centre after c; other vN are vias at no path point)
3.3V: C2.2 C3.2 C5.1 C6.1 C7.1 C8.2 D1.4 D3.1 D4.2 pad.1@-8.331,9.246 pad.1@-9.728,8.649 R1.2 R5.2 R6.1 R10.2 R11.2 U1.9 U1.10 U2.5 U3.3 U3.7 U3.8 U4.14 U4.17 | length 71.9
  Top Layer w0.152: R1.2@6.68,4.723 6.745,4.788 v1(8.026,4.788)
  Top Layer w0.254: C5.1@-11.481,13.409 C5.1@-11.402,13.488 ; U2.5@-9.786,13.488 U2.5@-9.707,13.566 ; pad.1@-9.728,8.649 -9.515,8.436 -9.515,7.715 v1(-9.398,7.598) ; v1(-5.512,6.414) -6.426,6.414 C2.2@-6.477,6.363 C2.2@-6.477,6.313 ; U1.10@-3.931,4.604 -6.458,4.604 C3.2@-6.477,4.585 C2.2@-6.477,6.313 ; U1.9@-3.931,5.604 -5.768,5.604 C2.2@-6.477,6.313 ; v1(11.608,6.515) 11.674,6.581 11.674,6.98 12.232,7.538 D1.4@12.357,7.538
  Top Layer w0.4: v2(-12.605,13.424) -12.598,13.417 -11.488,13.417 C5.1@-11.481,13.409 ; C5.1@-11.402,13.488 U2.5@-9.786,13.488
  Bottom Layer w0.152: U3.8@-4.432,16.36 -4.218,16.574 U3.8@-3.756,16.574 ; U4.17@2.326,20.071 U4.17@2.33,20.074 ; D3.1@3.278,9.639 5.74,9.639 v1(6.198,9.182) ; C6.1@4.801,18.569 4.865,18.504 v1(6.071,18.504)
  Bottom Layer w0.2: pad.1@-8.433,8.915 -7.569,10.706 v1(-5.74,12.535) -4.559,13.717 C7.1@-4.559,14.592 ; v1(-5.74,11.468) -3.48,13.729 -1.564,13.729 C8.2@-1.31,13.475 -1.206,13.579 C8.2@-1.206,13.665 ; C7.1@-4.534,14.637 -4.534,15.648 -4.432,15.75 U3.8@-4.432,16.36 ; v1(-2.235,26.149) R5.2@0.215,26.149 ; R6.1@-1.854,17.575 -2.126,17.303 ccw(c-1.984,17.162) -2.184,17.162 -2.184,16.873 ccw(c-1.984,16.873) -2.126,16.732 -1.805,16.732 -0.926,15.852 -0.926,15.006 -1.206,14.727 C8.2@-1.206,13.665 ; v1(-0.864,19.723) 0.023,18.836 D4.2@0.023,18.299 ; U4.17@2.326,20.071 2.326,16.217 1.522,15.413 0.516,15.413 -0.806,14.091 -0.806,13.881 -1.021,13.665 C8.2@-1.206,13.665 ; U4.17@2.33,20.074 2.33,20.859 2.57,21.1 3.206,21.736 3.892,21.736 U4.14@3.921,21.766 ; R11.2@6.045,20.774 6.071,20.749 v1(6.071,18.504) ; R10.2@8.204,20.774 8.576,21.146 11.522,18.199 v1(11.913,18.199)
  Bottom Layer w0.254: U3.3@-10.926,19.114 -10.391,19.114 -7.829,21.675 v1(-7.665,21.675) ; U3.8@-3.756,16.574 U3.7@-3.756,17.844 ; D4.2@0.023,18.199 D4.2@0.023,18.299 ; U4.14@3.921,21.766 3.974,21.713 4.507,21.713 4.826,21.394 C6.1@4.826,18.924
CS_EE: pad.1@-11.278,9.271 U3.1 U4.6 | length 28.8
  Bottom Layer w0.152: pad.1@-11.278,9.271 -11.251,9.623 -13.516,12.261 -13.516,13.898 -11.602,15.812 -11.602,16.36 U3.1@-11.388,16.574 ; U3.1@-10.926,16.574 U3.1@-11.388,16.574 ; U4.6@0.376,24.76 0.376,24.826 0.273,24.93 -8.47,24.93 -12.243,21.157 -12.243,17.356 -11.461,16.574 U3.1@-11.388,16.574
GND: C2.1 C3.1 C4.2 C5.2 C6.2 C7.2 C8.1 C9.1 C10.2 C11.1 C12.2 C14.2 J3.2 J3.MP1 J3.MP2 pad.5 pad.13 pad.14 R8.1 R12.1 R13.1 R14.2 R15.2 SW2.1 U1.6 U1.12 U1.14 U1.26 U1.30 U1.53 U1.EAGP1 U1.EAGP2 U1.EAGP3 U1.EAGP4 U1.EGP1 U1.EGP2 U1.EGP3 U1.EGP4 U1.EGP5 U1.EGP6 U1.EGP7 U1.EGP8 U1.EGP9 U1.EGP10 U1.EGP11 U1.EGP12 U2.2 U3.4 U4.16 U6.2 | length 44.8
  Top Layer w0.152: v2(-9.169,3.467) -9.045,3.467 C3.1@-7.927,4.585 C2.1@-7.927,6.363 ; C12.2@-7.214,8.047 -6.037,8.047 v1(-5.537,8.547) -3.988,8.547 U1.6@-3.931,8.604 ; U1.30@-1.806,13.529 U1.30@-1.532,13.255 ; R8.1@3.404,22.355 ccw(c3.445,22.355) 3.445,22.314 v1(5.004,22.314) ; C11.1@8.761,21.946 C11.1@8.788,21.919
  Top Layer w0.2: v1(-10.139,22.446) -10.009,22.446 -9.165,23.29 SW2.1@-8.865,23.29 SW2.1@-6.465,23.29 ; J3.2@8.469,15.269 8.919,15.269 9.319,14.869 9.319,13.569 10.019,12.869 J3.MP2@10.719,12.869
  Top Layer w0.4: U6.2@7.137,22.39 8.317,22.39 C11.1@8.761,21.946 ; 8.573,21.378 8.638,21.444 8.638,21.769 C11.1@8.788,21.919
  Top Layer w0.45: C9.1@-11.557,17.506 -11.502,17.506 -10.59,16.594 -9.568,16.594 -9.166,16.192 -9.012,16.192 -8.082,15.262 -8.082,14.714 -8.28,14.516 ; C5.2@-11.481,14.759 -11.456,14.759 -11.213,14.516 -8.28,14.516 ; C4.2@-3.835,17.297 -4.01,17.122 -4.075,17.122 -6.132,15.064 -6.132,15.02 -6.411,14.741 -6.455,14.741 -6.605,14.591 -7.032,14.591 U2.2@-7.107,14.516 -8.28,14.516
  Bottom Layer w0.2: U3.4@-10.926,20.384 -10.926,21.659 v1(-10.139,22.446) ; C8.1@0.798,13.881 0.392,13.475 C8.1@0.294,13.475 0.294,14.198 1.109,15.013 1.767,15.013 2.976,16.223 U4.16@2.976,20.071
  other v1: 10.566,4.331 13.868,11.697 6.549,13.159 -14.453,13.475 13.995,14.237 13.614,16.904 13.233,19.063 -12.929,19.952 8.534,25.286 -8.484,25.54 -4.42,28.08 4.343,28.08
LB: R4.2 U1.22 | length 7.1
  Top Layer w0.152: U1.22@4.319,10.604 4.472,10.757 5.359,10.757 5.715,11.113 9.407,11.113 9.915,10.604 10.245,10.274 R4.2@10.858,10.274
LG: R3.2 U1.21 | length 3.7
  Top Layer w0.152: U1.21@4.319,9.604 4.593,9.878 5.825,9.878 6.199,10.252 7.505,10.252 7.468,10.214 7.468,10.122 7.505,10.159 R3.2@7.505,10.249
LR: R2.2 U1.20 | length 3.3
  Top Layer w0.152: U1.20@4.319,8.604 4.477,8.446 R2.2@7.505,8.446
MISO: pad.@-11.278,14.669 U3.2 U4.5 | length 17.2
  Bottom Layer w0.152: pad.@-11.278,14.669 -9.728,16.218 -9.728,17.181 U3.2@-10.391,17.844 ; U3.2@-10.926,17.844 U3.2@-10.391,17.844 ; U4.5@-0.299,23.716 -2.586,23.716 -8.458,17.844 U3.2@-10.391,17.844
MOSI: pad.1@-11.252,11.849 U3.5 U4.4 | length 16.6
  Bottom Layer w0.152: pad.1@-11.252,11.849 -11.091,11.859 -6.782,16.707 -6.782,17.892 -4.291,20.384 U3.5@-3.756,20.384 -3.293,20.384 -3.079,20.597 -3.079,21.343 -1.357,23.066 U4.4@-0.569,23.066
NetC4_1: C4.1 D7.1 Q1.4 SW2.3 U2.1 | length 19.3
  Top Layer w0.152: SW2.3@-8.865,18.29 SW2.3@-6.465,18.29 -4.392,18.29 -3.885,18.797 C4.1@-3.835,18.797 -3.835,20.527 D7.1@-3.886,20.577
  Top Layer w0.4: U2.1@-7.107,13.566 -6.106,13.566 -5.029,14.643 -5.029,15.267 -3.85,16.447 -2.85,16.447 -2.616,16.681 -2.616,17.894 -1.727,18.784 ; D7.1@-3.886,20.577 -3.479,20.17 -3.114,20.17 -1.763,18.819 -1.304,18.819 Q1.4@-0.98,18.819
NetC9_2: C9.2 U2.4 | length 2
  Top Layer w0.152: C9.2@-11.557,15.946 -11.502,15.946 -11.022,15.466 U2.4@-9.707,15.466
NetC12_1: C12.1 FB1.2 U1.31 | length 7.4
  Top Layer w0.45: C12.1@-7.214,9.301 -7.188,9.326 -7.188,10.438 FB1.2@-7.163,10.463 -5.755,10.463 v1(-5.735,10.483) ; v3(-2.845,12.916) -2.845,12.875 -2.681,12.712 -2.681,12.279 U1.31@-2.556,12.154
  Bottom Layer w0.45: v1(-5.735,10.483) -5.278,10.483 v3(-2.845,12.916)
NetC14_1: C14.1 D5.1 pad.6@3.826,29.05 pad.7 pad.8 pad.9 R12.2 | length 18
  Top Layer w0.152: -3.168,29.68 pad.9@-1.244,29.68 ; C14.1@-1.499,25.149 C14.1@-1.574,25.149 ; D5.1@-0.746,22.226 -0.746,22.376 -1.02,22.65 -1.415,22.65 -2.515,23.75 -2.515,24.208 C14.1@-1.574,25.149 ; 3.079,29.68 pad.8@1.156,29.68 pad.9@-1.244,29.68 ; C14.1@-1.574,25.149 -3.144,25.149 R12.2@-3.236,25.057 -3.236,28.069 -2.549,28.756 -2.118,28.756 -1.244,29.63 pad.9@-1.244,29.68
NetD1_1: D1.1 R2.1 | length 2.1
  Top Layer w0.152: R2.1@9.005,8.446 9.101,8.35 9.519,8.35 10.218,7.651 10.644,7.651 D1.1@10.757,7.538